# Altium PCB BopItController.PcbDoc
Units mm, origin at the board's own origin, x right, y up, seen from the top; angles counter-clockwise.
Board outline 67.94 x 40 mm, 2 copper layers (Top Layer, Bottom Layer); 20 components, 19 nets, 85 pads, 1 vias.
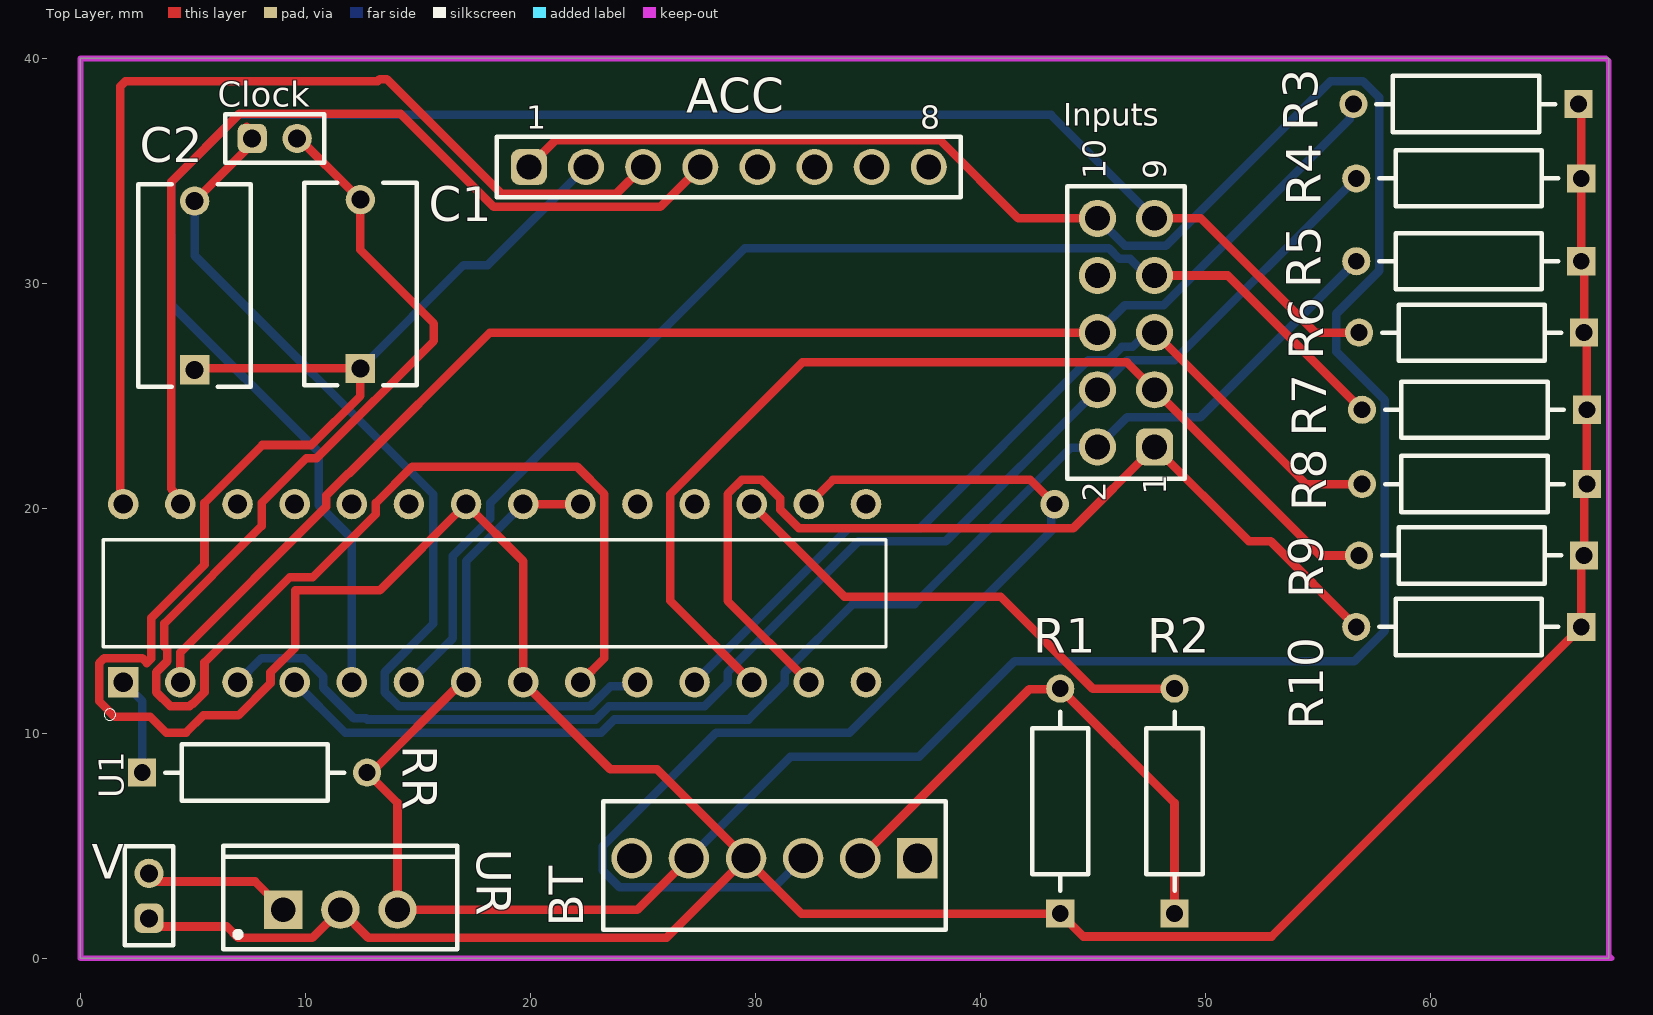
[diagram p0: Top Layer view]
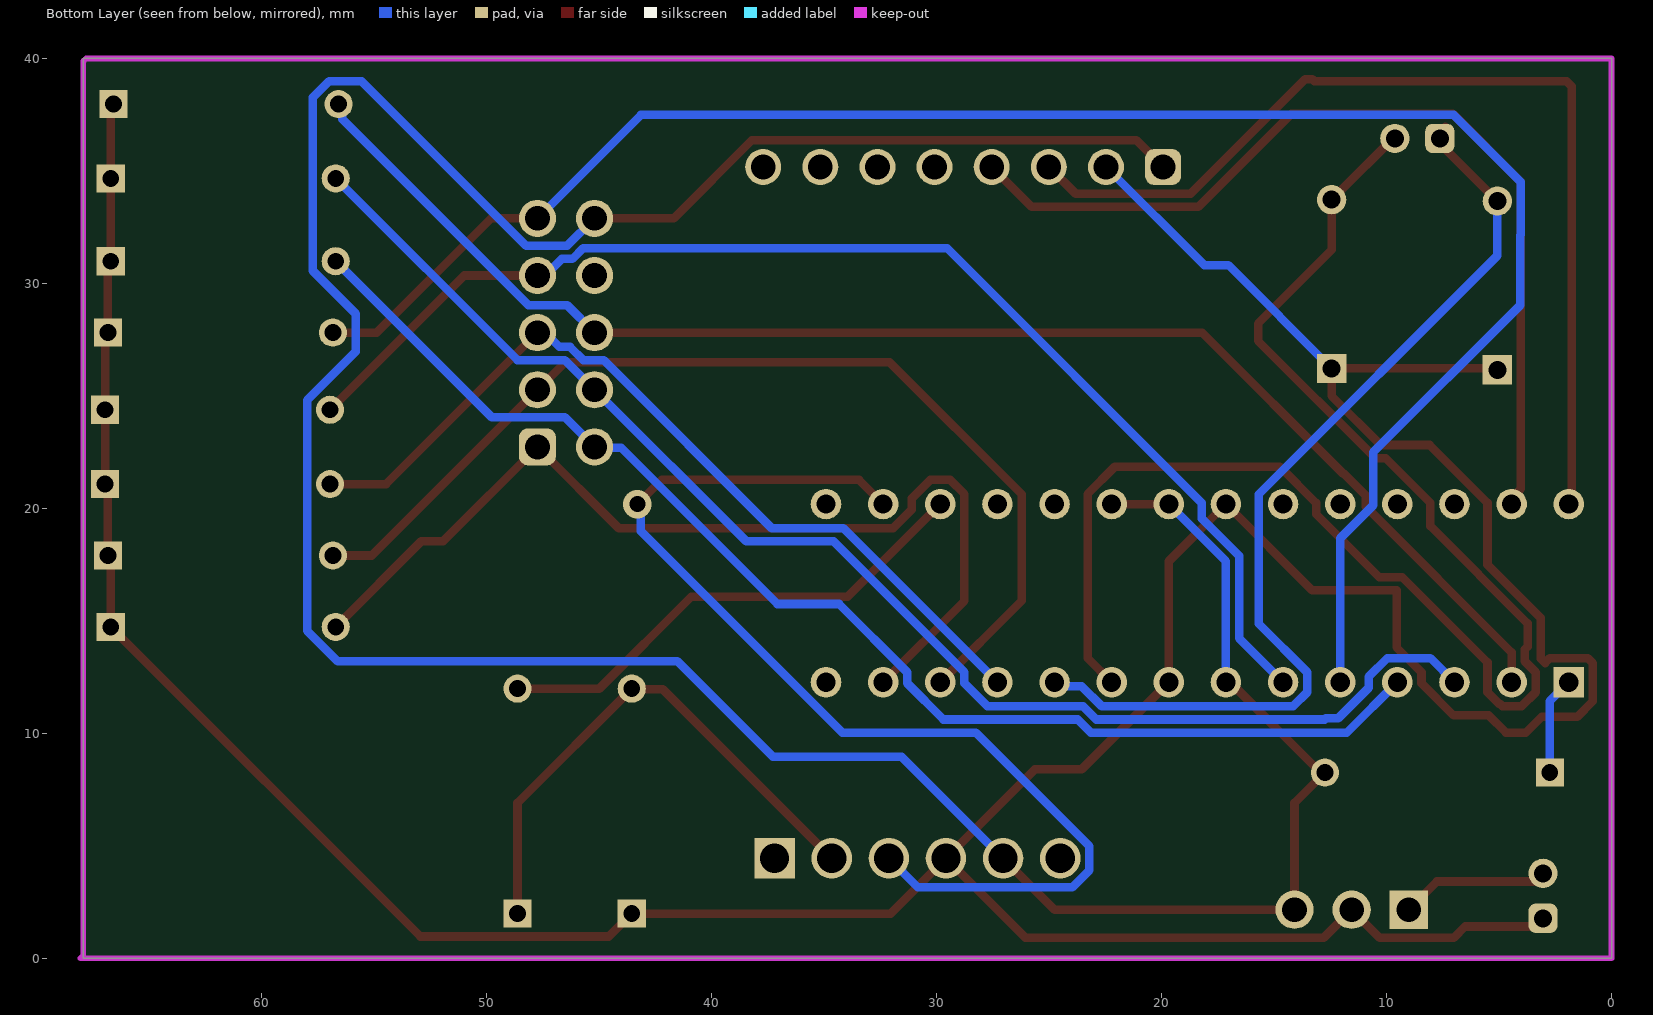
[diagram p1: Bottom Layer view, seen from below]
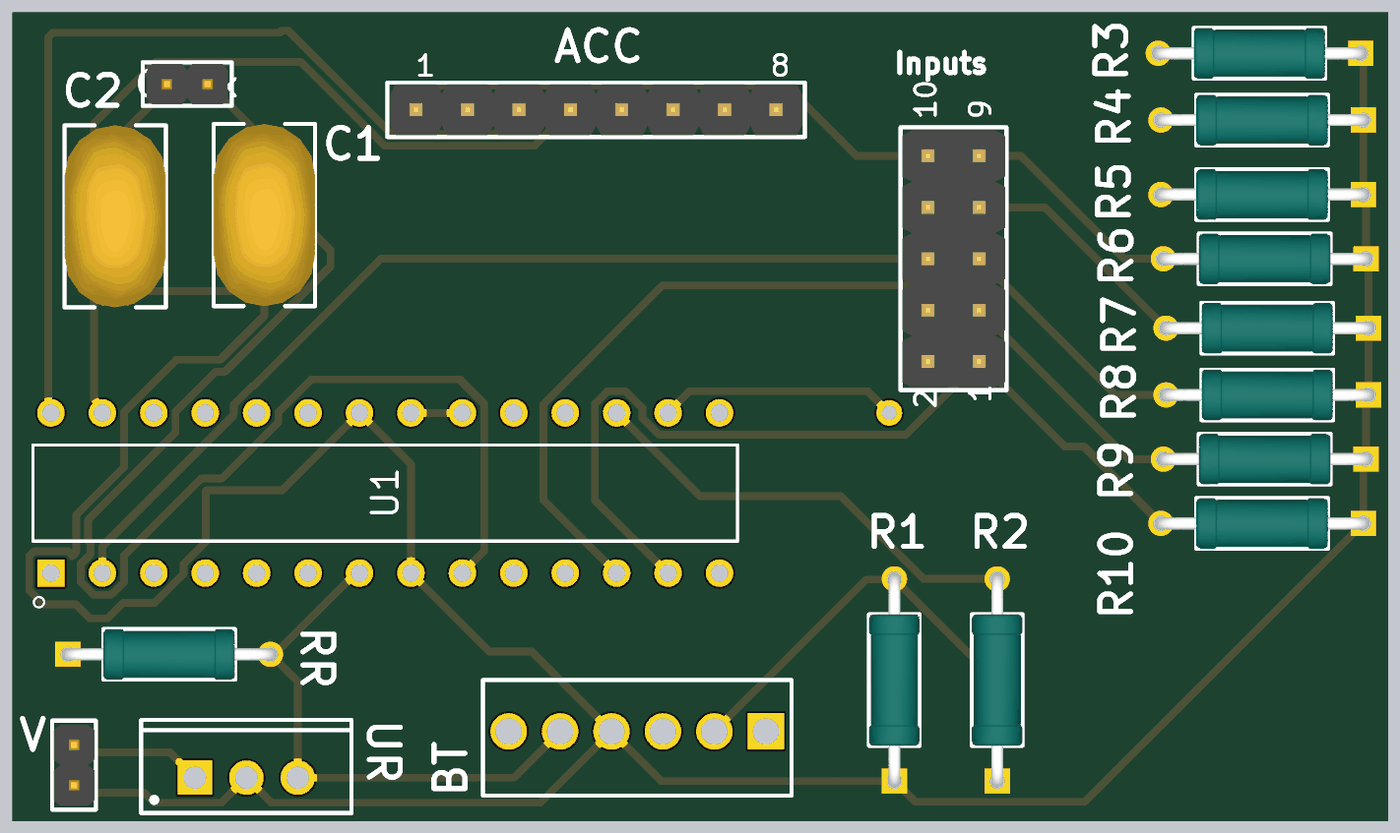
[diagram p2: 3D render of the assembled board from above, using the file's embedded part models]

## Layer stack, top to bottom
Top Solder: solder mask 0.0102, Solder Resist, Dk 3.5
Top Layer: signal copper 0.0356
Dielectric 1: dielectric 0.32, FR-4, Dk 4.8
Bottom Layer: signal copper 0.0356
Bottom Solder: solder mask 0.0102, Solder Resist, Dk 3.5

## Board outline
0,0 67.945,0 67.945,40.005 0,40.005

## Design rules (kind name [scope] priority, off if disabled: settings)
BoardOutlineClearance [All] p1: gap=0.2 ignorepadtopadclearanceinfootprint=FALSE except(0.4: Arc-SplitBarrior Arc-SplitContinuation Track-SplitBarrior Track-SplitContinuation SMDPad-SplitBarrior SMDPad-SplitContinuation THPad-SplitBarrior THPad-SplitContinuation Via-SplitBarrior Via-SplitContinuation Fill-SplitBarrior Fill-SplitContinuation Poly-SplitBarrior Poly-SplitContinuation Region-SplitBarrior Region-SplitContinuation Text-SplitBarrior Text-SplitContinuation)
Clearance "Clearance Bottom Layer" [OnLayer('Bottom Layer')] p1: gap=0.203 ignorepadtopadclearanceinfootprint=TRUE except(0.254: Arc-Text Track-Text SMDPad-Text THPad-Text Via-Text Fill-Text Poly-Text Region-Text Text-Text)
Clearance "Clearance Top Layer" [OnLayer('Top Layer')] p2: gap=0.203 ignorepadtopadclearanceinfootprint=TRUE except(0.254: Arc-Text Track-Text SMDPad-Text THPad-Text Via-Text Fill-Text Poly-Text Region-Text Text-Text)
Clearance [All] p3: gap=0.2 ignorepadtopadclearanceinfootprint=FALSE except(0.089: Arc-Arc Arc-Track Arc-SMDPad Track-Track Track-SMDPad SMDPad-SMDPad; 0.127: Arc-Via Track-Via SMDPad-Via THPad-Via Via-Via; 0.254: Arc-Text Track-Text SMDPad-Text THPad-Text Via-Text Fill-Text Poly-Text Region-Text Text-Text)
HoleSize [All] p1: absolutevalues=TRUE maxlimit=6.3 minlimit=0.2 maxpercent=80.000 minpercent=20.000
MinimumAnnularRing [All] p1: minimumring=0.076
MinimumSolderMaskSliver [All] p1: minsoldermaskwidth=0.1
PolygonConnect PolygonConnect_1 [All] p1: thpad.connectstyle=Relief thpad.reliefconductorwidth=0.508 thpad.reliefentries=4 thpad.polygonreliefangle="90 Angle" thpad.airgapwidth=0.254 smdpad.connectstyle=Relief smdpad.reliefconductorwidth=0.508 smdpad.reliefentries=4 smdpad.polygonreliefangle="90 Angle" smdpad.airgapwidth=0.254 via.connectstyle=Direct via.reliefconductorwidth=0.508 via.reliefentries=4 via.polygonreliefangle="90 Angle" via.airgapwidth=0.254
RoutingCorners [All] p1: cornerstyle=Round minsetback=2.54 maxsetback=2.54
RoutingVias [All] p1: holewidth=0.5 width=1 viastyle="Through Hole" minholewidth=0.2 minwidth=0.45 maxholewidth=1 maxwidth=2
SilkToSilkClearance [All] p1: silktosilkclearance=0.1
SilkToSolderMaskClearance [IsPad] p1: minsilkscreentomaskgap=0.1 clearancetoexposedcopper=TRUE
SolderMaskExpansion [All] p1: expansion=0.102 istentingtop=FALSE
Width [All] p1: maxlimit=2.54 minlimit=0.089 preferedwidth=0.381
25 further rules are at their usual default settings.

## Components (designator, comment, footprint, x,y, rotation, side; value= is the part's Value field where it differs from the comment)
ACC "MPU6050" 61300811121 28.829,35.179 r0 top
BT "HC-05" TECO-640456-6_V 37.211,4.445 r180 top
C1 "22p" FP-VY2222M35Y5US6TV7-MFG 12.446,29.972 r90 top
C2 "22p" FP-VY2222M35Y5US6TV7-MFG 5.08,29.912 r90 top
Clock "Crystal" 62000211121 8.636,36.449 r0 top
Inputs "Wires" 61301021121 46.482,27.813 r90 top
R1 "2k" FP-MRS25-MFG 43.561,6.985 r90 top
R2 "1k" FP-MRS25-MFG 48.641,6.985 r90 top
R3 "1k" FP-MRS25-MFG 61.595,37.973 r180 top
R4 "1k" FP-MRS25-MFG 61.722,34.671 r180 top
R5 "1k" FP-MRS25-MFG 61.722,30.988 r180 top
R6 "1k" FP-MRS25-MFG 61.849,27.813 r180 top
R7 "1k" FP-MRS25-MFG 61.976,24.384 r180 top
R8 "1k" FP-MRS25-MFG 61.976,21.082 r180 top
R9 "1k" FP-MRS25-MFG 61.849,17.907 r180 top
R10 "1k" FP-MRS25-MFG 61.722,14.732 r180 top
RR "1k" FP-MRS25-MFG 7.747,8.255 r0 top
U1 "ATMEGA328P-PU" DIP794W46P254L2967H457Q28B 18.415,16.233 r90 top
UR "5v" TO220 11.557,2.159 r0 top
V "9v" 62000211121 3.048,2.778 r90 top

## Footprints (in the part's own frame and the unit in brackets; to place one, negate y for a bottom-side part, rotate by r counter-clockwise, add the part's x,y. Pads: shape width x height; smd on the part's side, far side on the other; paste and mask are expansions set on the pad)
61300811121 [mm] "Pin Header, pitch 2.54 mm, THT, Vertical, single row, 8p"
  rrect50% 1.6x1.6 hole 1.1: 1(-8.89,0)
  round 1.6 hole 1.1: 2(-6.35,0) 3(-3.81,0) 4(-1.27,0) 5(1.27,0) 6(3.81,0) 7(6.35,0) 8(8.89,0)
  silkscreen extent -10.31,-1.35 10.31,1.35, body extent -10.16,-1.27 10.16,1.27, height 8.57
61301021121 [mm] "Pin Header, pitch 2.54 mm, THT, Vertical, dual row, 10p"
  rrect50% 1.65x1.65 hole 1.1: 1(-5.08,-1.27)
  round 1.65 hole 1.1: 2(-5.08,1.27) 3(-2.54,-1.27) 4(-2.54,1.27) 5(0,-1.27) 6(0,1.27) 7(2.54,-1.27) 8(2.54,1.27) 9(5.08,-1.27) 10(5.08,1.27)
  silkscreen extent -6.5,-2.62 6.5,2.62, body extent -6.35,-2.54 6.35,2.54, height 8.59
62000211121 [mm] "Pin Header, pitch 2.00 mm, THT, Vertical, single row, 2p"
  rrect50% 1.3x1.3 hole 0.8: 1(-1,0)
  round 1.3 hole 0.8: 2(1,0)
  silkscreen extent -2.2,-1.07 2.2,1.07, body extent -2,-1 2,1, height 6.05
DIP794W46P254L2967H457Q28B [mm]
  rect 1.358x1.358 hole 0.85: 1(-3.96,16.51)
  round 1.358 hole 0.85: 2(-3.96,13.97) 3(-3.96,11.43) 4(-3.96,8.89) 5(-3.96,6.35) 6(-3.96,3.81) 7(-3.96,1.27) 8(-3.96,-1.27) 9(-3.96,-3.81) 10(-3.96,-6.35) 11(-3.96,-8.89) 12(-3.96,-11.43) 13(-3.96,-13.97) 14(-3.96,-16.51) 15(3.96,-16.51) 16(3.96,-13.97) 17(3.96,-11.43) 18(3.96,-8.89) 19(3.96,-6.35) 20(3.96,-3.81) 21(3.96,-1.27) 22(3.96,1.27) 23(3.96,3.81) 24(3.96,6.35) 25(3.96,8.89) 26(3.96,11.43) 27(3.96,13.97) 28(3.96,16.51)
  silkscreen extent -5.65,-17.4 2.38,17.4
FP-MRS25-MFG [mm]
  rect 1.25x1.25 hole 0.75 paste-2539.97 mask+0: 1(-5,0)
  round 1.25 hole 0.75 paste-2539.97 mask+0: 2(5,0)
  silkscreen extent -3.98,-1.25 3.98,1.25, body extent -5.72,-1.35 5.72,1.35, height 0.25
FP-VY2222M35Y5US6TV7-MFG [mm]
  rect 1.3x1.3 hole 0.8 paste-2539.97 mask+0: 1(-3.75,0)
  round 1.3 hole 0.8 paste-2539.97 mask+0: 2(3.75,0)
  silkscreen extent -4.5,-2.5 4.5,2.5, body extent -4.6,-2.6 4.6,2.6, height 0.25
TECO-640456-6_V [mm] "THD, 6-Leads, Body 15.24x5.72mm, Pitch 2.54mm"
  rect 1.8x1.8 hole 1.3: 1(0,0)
  round 1.8 hole 1.3: 2(2.54,0) 3(5.08,0) 4(7.62,0) 5(10.16,0) 6(12.7,0)
  silkscreen extent -1.27,-2.54 13.97,3.18, body extent -1.27,-2.54 13.97,3.18, height 10.03
TO220 [mm] "TO, Thru-Hole, Vertical, Heatsink Mounted; 3 In-Line Leads; Pitch 2.54 mm"
  rect 1.7x1.7 hole 1.1: 1(-2.54,0)
  round 1.7 hole 1.1: 2(0,0) 3(2.54,0)
  silkscreen extent -5.2,-1.75 5.2,2.85, body extent -5.25,-1.8 5.25,2.9, height 19.7

## Part data
ACC: library part CMP-1502-01076-2, Color=Black, Contact Resistance=20mΩ, Current Rating=3A, Max Operating Temperature=105°C, Min Operating Temperature=-40°C, Operating Supply Voltage=250V, Connector Type="Male Pin", Contact Material=Copper, Contact Mating Length=5.9944mm, Contact Plating=Gold, Gender=Male, Height=8.54mm, Lead Pitch=2.54mm, Mount="Through Hole", NexarPartId=32855533, Number of Contacts=8, Number of Pins=8, Number of Positions=8, Number of Rows=1, Orientation=Vertical, Packaging=Bulk, Pitch=2.54mm, REACH SVHC=Unknown, RoHS=Compliant, Termination=Solder, Voltage Rating=250V
BT: library part CMP-2000-05661-1, "Male Header, Pitch 2.54 mm, 1 x 6 Position, Height 10.03 mm, Tail Length 3.56 mm, -55 to 105 degC, Bulk", Color=White, Current, Rating="5 /  / A", Flammability Rating=UL94V-0, Manufacturer="TE Connectivity", Package Description="Male Header, Pitch 2.54 mm, 1 x 6 Position, Height 10.03 mm, Tail Length 3.56 mm", Package Reference=640456-6, Temperature, Operating="-55to+105 /  / °C", Voltage, Rating="250 /  / V", Agency Approvals=CSA,UL, Angle=Straight, Brand/Series=MTA-100Series, Color, Housing=White, Connector Type=MTA-100, Contact Centerline Spacing="0.100 /  / in.", Contact Mating Area Plating=Tin, Contact Plating=Tin, Contact Shape=Square, Contact Termination Area Plating=Tin, Datasheet URL=https://datasheet.ciiva.com/25618/0900766b80eb7fdd-25618163.pdf, Datasheet Version="Rev. W, 05/2005", Length, Overall="0.6 /  / \"", Length, Pin="0.14 /  / \"", Length, Terminal Post="0.14 /  / in.", Manufacturer URL=http://www.te.com/, Material, Contact=CopperAlloy, Material, Housing=Polyester, Mount Angle=Vertical, Mounting Hole Size="0.04 /  / \"", Mounting Technology=ThroughHole, Mounting Type=PCMount, Number of Contacts=6, Number of Positions=6, Number of Rows=1, Pin Spacing="0.1 /  / \"", Primary Type=InterconnectSystem, Size, Post="0.025 /  / in.", Special Features=Pinstrip, Standards=RoHSCompliant,ELVCompliant,UL94V-0, Termination=Solder, Type=PCBPlug
C1 C2: library part CMP-00030-44033212-1, "VY2222M35Y5US6TV7 2.2nF 300 V ac Ceramic Single Layer Capacitor; Y5U Dielectric THT VY2 Series", Capacitance=2.2nF, Case/Package=Radial, Dielectric=Y5U, Max Operating Temperature=125°C, Min Operating Temperature=-40°C, Tolerance=20%, Voltage=250V, Voltage Rating=1kV, Voltage Rating (AC)=300V, Composition=Ceramic, Depth=5mm, Diameter=9mm, Dissipation Factor=2.5%, Height=12mm, Height - Seated (Max)=13.0048mm, Lead Diameter=600µm, Lead Free="Lead Free", Lead Pitch=7.5mm, Lead/Base Style=Kinked, Material=Ceramic, Mount="Through Hole", NexarPartId=44033212, Radiation Hardening=No, REACH SVHC=Unknown, RoHS=Compliant, Schedule B="8532230060, 8532230060", Termination=Radial, Thickness=5mm
Clock V: library part CMP-1502-00956-3, Contact Resistance=20mΩ, Current Rating=2A, Max Operating Temperature=105°C, Min Operating Temperature=-40°C, Operating Supply Voltage=200V, Contact Material=Gold, Gender=Male, Height=6.35mm, Lead Pitch=2mm, NexarPartId=61924778, Number of Contacts=2, Number of Pins=2, Number of Rows=1, Orientation=Vertical, RoHS=Non-Compliant, Voltage Rating=200V
Inputs: library part CMP-1502-01084-2, Color=Black, Contact Resistance=20mΩ, Current Rating=3A, Flammability Rating="UL94 V-0", Insulation Resistance=1GΩ, Max Operating Temperature=105°C, Min Operating Temperature=-40°C, Operating Supply Voltage=250V, Connector Type="Male Pin", Contact Gender=Male, Contact Material=Copper, Contact Mating Length=5.9944mm, Contact Plating=Gold, Gender=Male, Height=2.54mm, Housing Material=PBT, Insulation=Insulated, Lead Pitch=2.54mm, Length=12.7mm, Mount="Through Hole", NexarPartId=18818163, Number of Contacts=10, Number of Pins=10, Number of Positions=10, Number of Rows=2, Orientation=Vertical, Packaging=Bulk, Pitch=2.54mm, REACH SVHC=Unknown, RoHS=Compliant, Row Spacing=2.54mm, Termination="Through Hole", Voltage Rating=250V, Width=12.7mm
R1 R2 R3 R4 R5 R6 R7 R8 R9 R10 RR: library part CMP-00030-42757237-1, "MRS25000C1000FRP00 Resistor, 100 Ohm, ± 1%, 600 mW, Axial Leaded, Metal Film (Thin Film), Professional", Case/Package=Axial, Max Operating Temperature=155°C, Max Power Dissipation=600mW, Min Operating Temperature=-55°C, Resistance=100Ω, Temperature Coefficient=50ppm/°C, Tolerance=1%, Voltage Rating=350V, Composition="Metal Film, Thin Film", Contact Plating=Tin, Diameter=2.5mm, Lead Diameter=600µm, Lead Free="Lead Free", Length=6.5mm, Military Standard=Not, Mount="Through Hole", NexarPartId=42757237, Number of Pins=2, Number of Terminations=2, Packaging="Tape & Reel (TR)", Power Rating=600mW, Radiation Hardening=No, REACH SVHC=Unknown, RoHS=Compliant, Schedule B="8533210090, 8533210090", Termination=Axial, Voltage Rating (DC)=350V, Width=2.5mm
U1: "ATmega Series 20 MHz 32 KB Flash 2 KB SRAM 8-Bit Microcontroller - DIP-28", Package=None, Availability=Unavailable, MP=ATMEGA328P-PU, Price=None
UR: library part CMP-0244-00483-1, "Positive Voltage Regulator, 5V, 3-Pin TO-220", ComponentLink1Description="Manufacturer URL", ComponentLink1URL=http://www.st.com, ComponentLink2Description=Datasheet, ComponentLink2URL=http://www.st.com/internet/com/TECHNICAL_RESOURCES/TECHNICAL_LITERATURE/DATASHEET/CD00000444.pdf, ComponentLink3Description="Package Specification", ComponentLink3URL=http://www.st.com/internet/com/TECHNICAL_RESOURCES/TECHNICAL_LITERATURE/PACKAGE_INFORMATION/CD00004649.pdf, DatasheetVersion=16/11/2011, PackageDescription="TO, Thru-Hole, Vertical, Heatsink Mounted; 3 In-Line Leads; Pitch 2.54 mm", PackageReference=TO220, PackageVersion=ver3.0

## Via types
v1: diameter 1.27, hole 0.711, Top Layer to Bottom Layer, 1 vias

## Nets (pads, with @x,y where several pads share a name; then routed paths per layer and width w, separated by ;. In a path a pad name is that pad's centre, name@x,y a point inside that pad or via, vN(x,y) a via of type N, cw(c..) or ccw(c..) an arc to the next point about the centre after c; other vN are vias at no path point)
NetACC_1: ACC.1 BT.5 Inputs.10 RR.2 U1.7 U1.20 U1.21 UR.3 | length 142.2
  Top Layer w0.381: U1.7 16.955,12.273 12.937,8.255 RR.2 14.097,6.905 UR.3 24.765,2.159 BT.5 ; U1.21 U1.20 ; ACC.1 21.133,36.373 38.213,36.373 41.693,32.893 Inputs.10
  Bottom Layer w0.381: U1.7 17.145,17.653 U1.21 ; BT.5 31.568,8.962 37.283,8.962 41.529,13.208 56.639,13.208 57.995,14.564 57.995,24.806 55.83,26.97 55.83,28.656 57.741,30.566 57.741,38.268 57.017,38.992 55.574,38.992 48.257,31.674 46.44,31.674 45.222,32.893 Inputs.10
NetACC_2: ACC.2 BT.4 C1.1 C2.1 R1.1 R3.1 R4.1 R5.1 R6.1 R7.1 R8.1 R9.1 R10.1 U1.8 U1.22 UR.2 V.1 | length 185.5
  Top Layer w0.381: 2.943,13.114 2.961,13.132 ; V.1@3.048,1.413 6.515,1.413 7.013,0.915 10.313,0.915 UR.2 12.801,0.915 26.061,0.915 BT.4 ; C2.1 5.14,26.222 C1.1 12.446,25 10.264,22.819 8.094,22.819 5.518,20.243 5.518,17.497 3.15,15.129 3.15,13.321 2.961,13.132 ; R3.1 66.722,37.846 R4.1 R5.1 66.849,30.861 R6.1 66.976,27.686 R7.1 R8.1 66.849,20.955 R9.1 66.722,17.78 R10.1 52.956,0.966 44.58,0.966 R1.1 32.051,1.985 BT.4 ; 2.961,13.132 2.747,13.346 1.063,13.346 0.832,13.115 0.832,11.431 1.531,10.732 3.111,10.732 3.81,10.033 4.699,10.033 5.461,10.795 7.024,10.795 8.452,12.223 8.452,12.717 9.557,13.822 9.557,16.362 13.314,16.362 U1.22 19.685,17.653 U1.8 23.557,8.401 25.635,8.401 BT.4
  Bottom Layer w0.381: C1.1 17.038,30.814 18.114,30.814 ACC.2
NetACC_3: ACC.3 U1.28 | length 44.6
  Top Layer w0.381: U1.28 1.778,20.32 1.778,38.766 2.001,38.989 13.208,38.989 13.304,39.085 13.62,39.085 18.72,33.985 23.825,33.985 ACC.3
NetACC_4: ACC.4 U1.27 | length 41.7
  Top Layer w0.381: U1.27 4.445,20.457 4.036,20.866 4.036,34.516 7.062,37.541 14.234,37.541 18.374,33.401 25.781,33.401 ACC.4
NetBT_2: BT.2 R1.2 R2.1 | length 24.1
  Top Layer w0.381: BT.2 42.181,11.955 43.531,11.955 R1.2 48.641,6.905 R2.1
NetBT_3: BT.3 U1.16 | length 49.7
  Top Layer w0.381: U1.16 33.458,21.266 42.234,21.266 v1(43.307,20.193)
  Bottom Layer w0.381: BT.3 30.837,3.151 23.975,3.151 23.217,3.909 23.217,4.981 28.268,10.032 34.201,10.032 43.156,18.986 43.156,20.042 v1(43.307,20.193)
NetC1_2: C1.2 Clock.2 U1.9 | length 68
  Top Layer w0.381: Clock.2@9.398,36.77 C1.2 12.446,31.489 15.717,28.218 15.717,27.446 10.506,22.235 10.05,22.235 8.058,20.243 8.058,19.211 3.734,14.887 3.734,13.855 3.861,13.728 3.861,13.206 3.372,12.717 3.372,11.829 4.001,11.2 4.85,11.2 4.933,11.283 4.973,11.283 5.518,11.829 5.518,13.149 9.315,16.946 10.335,16.946 13.138,19.749 13.138,20.243 14.745,21.85 22.085,21.85 23.298,20.637 23.298,13.346 U1.9
NetC2_2: C2.2 Clock.1 U1.10 | length 43.3
  Top Layer w0.381: C2.2 7.398,35.98 Clock.1@7.398,36.957
  Bottom Layer w0.381: C2.2 5.08,31.235 15.678,20.637 15.678,14.863 13.532,12.717 13.532,11.829 14.161,11.2 22.669,11.2 23.555,12.086 24.578,12.086 U1.10
NetInputs_1: Inputs.1 R10.2 U1.13 | length 44.1
  Top Layer w0.381: U1.13 28.772,15.886 28.772,20.637 29.401,21.266 30.289,21.266 31.115,20.44 31.115,19.946 31.941,19.12 44.139,19.12 Inputs.1 51.948,18.537 52.917,18.537 R10.2
NetInputs_2: Inputs.2 R5.2 U1.4 | length 57.1
  Bottom Layer w0.381: U1.4 11.766,10.032 23.153,10.032 23.737,10.616 29.705,10.616 31.312,12.223 31.312,12.717 34.345,15.75 37.086,15.75 44.039,22.703 45.182,22.703 46.533,24.054 49.788,24.054 R5.2
NetInputs_3: Inputs.3 R9.2 U1.12 | length 46.5
  Top Layer w0.381: U1.12 26.232,15.886 26.232,20.637 32.087,26.492 46.533,26.492 Inputs.3 55.118,17.907 R9.2
NetInputs_4: Inputs.4 R4.2 U1.3 | length 61.9
  Bottom Layer w0.381: U1.3 8.058,13.346 9.969,13.346 10.795,12.52 10.795,12.026 12.153,10.668 12.7,10.668 12.752,10.616 22.911,10.616 23.496,11.2 27.749,11.2 28.772,12.223 28.772,12.717 34.591,18.536 38.475,18.536 Inputs.4 45.222,25.273 46.543,26.594 48.645,26.594 R4.2
NetInputs_5: Inputs.5 R8.2 U1.11 | length 38.9
  Top Layer w0.381: Inputs.5 54.483,21.082 R8.2
  Bottom Layer w0.381: U1.11 34.152,19.12 37.336,19.12 44.81,26.594 45.717,26.594 46.301,27.179 46.774,27.179 47.409,27.813 Inputs.5
NetInputs_6: Inputs.6 R3.2 U1.2 | length 64.2
  Top Layer w0.381: U1.2 4.445,13.596 10.93,20.081 10.93,20.575 11.891,21.536 11.929,21.536 18.206,27.813 Inputs.6
  Bottom Layer w0.381: Inputs.6 46.431,29.032 48.154,29.032 56.429,37.306 56.429,37.807 R3.2
NetInputs_7: Inputs.7 R7.2 U1.6 | length 55.9
  Top Layer w0.381: Inputs.7 51.007,30.353 R7.2
  Bottom Layer w0.381: U1.6 16.561,14.229 16.561,17.895 18.218,19.552 18.218,20.243 29.547,31.572 45.717,31.572 46.198,31.09 46.672,31.09 47.409,30.353 Inputs.7
NetInputs_9: Inputs.9 R6.2 U1.5 | length 83.6
  Top Layer w0.381: Inputs.9 49.815,32.893 54.895,27.813 R6.2
  Bottom Layer w0.381: U1.5 12.065,18.676 10.598,20.143 10.598,22.501 4.064,29.035 4.064,32.131 4.036,32.159 4.036,34.516 7.013,37.493 43.152,37.493 Inputs.9
NetR2_2: R2.2 U1.17 | length 22.2
  Top Layer w0.381: U1.17 33.959,16.079 40.908,16.079 45.002,11.985 R2.2
NetRR_1: RR.1 U1.1 | length 4.4
  Bottom Layer w0.381: U1.1 2.747,11.431 RR.1
NetUR_1: UR.1 V.2 | length 6.5
  Top Layer w0.381: V.2@3.048,3.413 7.763,3.413 UR.1
pads on no net: ACC.5 ACC.6 ACC.7 ACC.8 BT.1 BT.6 Inputs.8 U1.14 U1.15 U1.18 U1.19 U1.23 U1.24 U1.25 U1.26

## Keep-outs
Keep-Out Layer:
  lines w0.254: 0,0 68.072,0 67.945,0.127 67.945,39.878 67.818,40.005 0,40.005 0,0

## Text inside footprints (layer, text, board x,y; h text height)
ACC: Top Overlay "1" at 19.819,36.879 h1.02; Top Overlay "8" at 37.339,36.879 h1.02
Inputs: Top Overlay "2" at 45.582,20.303 h1.02 r90; Top Overlay "1" at 48.282,20.603 h1.02 r90; Top Overlay "9" at 48.282,34.623 h1.02 r90; Top Overlay "10" at 45.582,34.623 h1.02 r90